# EAGLE board MouseGoggles Hat-1-9 (EAGLE 9.6.2)
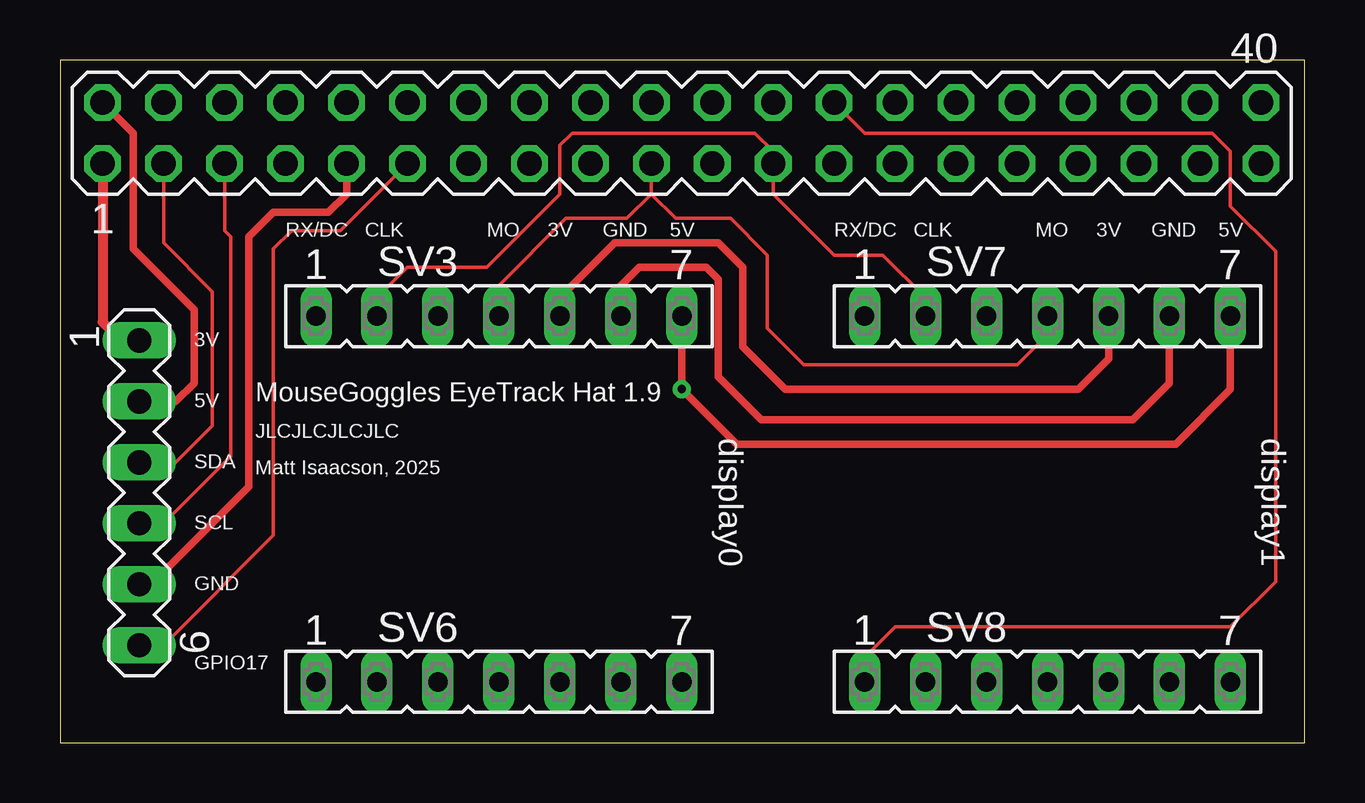
[diagram p0: board, top side]
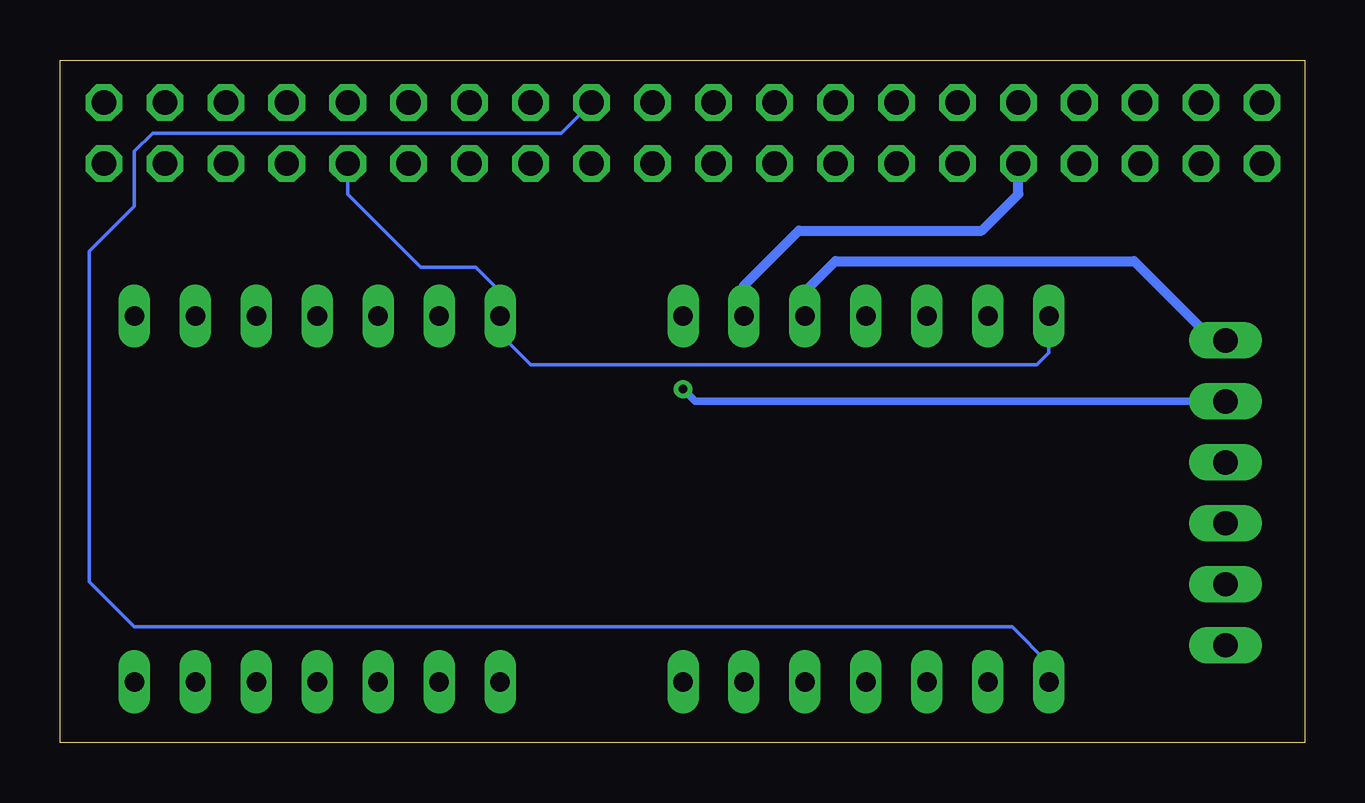
[diagram p1: board, bottom side, seen from below]

Size 51.87 x 28.45 mm. Coordinates in mm from the lower left corner, seen from the top.
Outline: 0,0 51.87,0 51.87,28.45 0,28.45 0,0
Copper layers (1*16): Top 0.035mm / dielectric 1.5mm / Bottom 0.035mm
Design rules "default": minimum track width 6mil, minimum drill 0.35mm, track to track 6mil, track to pad 6mil, pad to pad 6mil, via to via 6mil, smd to smd 6mil, copper to edge 40mil, drill to drill 6mil, minimum pad ring 10mil, minimum via ring 8mil, stop-mask expansion 4mil, vias tented up to drill 0mil, thermal gap 10mil

## Footprints (pad centres in the part's own frame; a part is rotated, then mirrored left to right if it is on the bottom)
MA20-2 = drill 1.016 octagon: 1 -24.13,-1.27; 2 -24.13,1.27; 3 -21.59,-1.27; 4 -21.59,1.27; 5 -19.05,-1.27; 6 -19.05,1.27; 7 -16.51,-1.27; 8 -16.51,1.27; 9 -13.97,-1.27; 10 -13.97,1.27; 11 -11.43,-1.27; 12 -11.43,1.27; 13 -8.89,-1.27; 14 -8.89,1.27; 15 -6.35,-1.27; 16 -6.35,1.27; 17 -3.81,-1.27; 18 -3.81,1.27; 19 -1.27,-1.27; 20 -1.27,1.27; 21 1.27,-1.27; 22 1.27,1.27; 23 3.81,-1.27; 24 3.81,1.27; 25 6.35,-1.27; 26 6.35,1.27; 27 8.89,-1.27; 28 8.89,1.27; 29 11.43,-1.27; 30 11.43,1.27; 31 13.97,-1.27; 32 13.97,1.27; 33 16.51,-1.27; 34 16.51,1.27; 35 19.05,-1.27; 36 19.05,1.27; 37 21.59,-1.27; 38 21.59,1.27; 39 24.13,-1.27; 40 24.13,1.27
FE07 = drill 0.813 long: 1 -7.62,0; 2 -5.08,0; 3 -2.54,0; 4 0,0; 5 2.54,0; 6 5.08,0; 7 7.62,0
MA06-1 = drill 1.016 long: 1 -6.35,0; 2 -3.81,0; 3 -1.27,0; 4 1.27,0; 5 3.81,0; 6 6.35,0

## Placement (x,y rotation side)
SV1  [MA20-2]  25.91,25.4 0 top
SV3  [FE07]  18.29,17.78 0 top
SV4  [MA06-1]  3.3,10.41 270 top
SV6  [FE07]  18.29,2.54 0 top
SV7  [FE07]  41.15,17.78 0 top
SV8  [FE07]  41.15,2.54 0 top

## Library data of the parts
SV1 SV4 = con-lstb; OC_FARNELL: unknown; OC_NEWARK: unknown
SV3 SV6-SV8 = con-lsta; OC_FARNELL: unknown; OC_NEWARK: unknown

## Nets
N$1: SV1.1 SV3.5 SV4.1 SV7.5
N$2: SV1.9 SV3.6 SV4.5 SV7.6
N$4: SV1.23 SV3.2 SV7.2
N$5: SV1.24 SV6.1
N$6: SV1.26 SV8.1
N$7: SV1.31 SV3.1 SV7.1
N$8: SV1.19 SV3.4 SV7.4
N$9: SV1.3 SV4.3
N$10: SV1.5 SV4.4
N$11: SV1.11 SV4.6
N$13: SV1.2 SV3.7 SV4.2 SV7.7

## Tracks (layer width: path | path; a pad name or v marks a point on that pad's centre or on a via)
N$1
  Top 0.152: 20.83,18.54 SV3.5
  Top 0.305: SV7.5 43.69,16 42.42,14.73 30.23,14.73 28.45,16.51 28.45,19.81 27.43,20.83 23.11,20.83 20.83,18.54
  Top 0.406: SV1.1 1.78,17.53 2.54,16.76 SV4.1
  Bottom 0.305: 3.81,16.76 SV4.1
  Bottom 0.406: SV3.5 20.83,18.8 19.56,20.07 7.11,20.07 3.81,16.76
N$2
  Top 0.152: 23.37,19.05 SV3.6
  Top 0.305: SV1.9 11.94,22.86 11.18,22.1 8.89,22.1 7.87,21.08 7.87,10.67 3.81,6.6 SV4.5 | SV7.6 46.23,14.99 44.7,13.46 29.21,13.46 27.43,15.24 27.43,19.3 26.92,19.81 24.13,19.81 23.37,19.05
  Bottom 0.406: SV3.6 23.37,19.05 21.08,21.34 13.46,21.34 11.94,22.86 SV1.9
N$4
  Top 0.152: SV7.2 36.07,18.54 34.29,20.32 32.26,20.32 29.72,22.86 SV1.23 29.72,24.64 28.96,25.4 21.34,25.4 20.83,24.89 20.83,22.86 17.78,19.81 14.48,19.81 13.21,18.54 SV3.2
N$5
  Bottom 0.152: SV1.24 30.99,25.4 48.01,25.4 48.77,24.64 48.77,22.35 50.65,20.47 50.65,6.71 48.77,4.83 12.19,4.83 10.67,3.3 SV6.1
N$6
  Top 0.152: SV1.26 33.53,25.4 48.01,25.4 48.77,24.64 48.77,22.35 50.65,20.47 50.65,6.71 48.77,4.83 34.8,4.83 33.53,3.56 SV8.1
N$7
  Bottom 0.152: SV1.31 39.88,22.86 36.83,19.81 34.54,19.81 33.53,18.8 SV7.1 33.53,17.02 32.26,15.75 11.18,15.75 10.67,16.26 SV3.1
N$8
  Top 0.152: SV7.4 41.15,17.02 39.88,15.75 30.99,15.75 29.46,17.27 29.46,20.32 27.94,21.84 25.65,21.84 24.64,22.86 | SV1.19 24.64,22.86 | 24.64,22.86 23.62,21.84 21.08,21.84 18.29,19.05 SV3.4
N$9
  Top 0.152: SV4.3 4.83,11.68 6.35,13.21 6.35,18.8 4.32,20.83 SV1.3
N$10
  Top 0.152: SV4.4 4.32,9.14 7.11,11.94 7.11,21.08 6.86,21.34 SV1.5
N$11
  Top 0.152: SV1.11 11.68,21.34 9.65,21.34 8.89,20.57 8.89,8.64 4.32,4.06 SV4.6
N$13  (via drill 0.35)
  Top 0.305: SV1.2 3.05,25.4 3.05,20.57 5.59,18.03 5.59,14.99 4.83,14.22 SV4.2 | SV7.7 48.77,14.73 46.48,12.45 28.19,12.45 v25.91,14.73 SV3.7
  Bottom 0.305: v25.91,14.73 25.4,14.22 SV4.2

## Text on the board
tNames: RX/DC | CLK | MO | 3V | GND | 5V | RX/DC | CLK | MO | 3V | GND | 5V | 3V | 5V | MouseGoggles EyeTrack Hat 1.9 | JLCJLCJLCJLC | display0 | display1 | SDA | Matt Isaacson, 2025 | SCL | GND | GPIO17